# EAGLE board REMOTE_CONTROL (EAGLE 9.1.3)
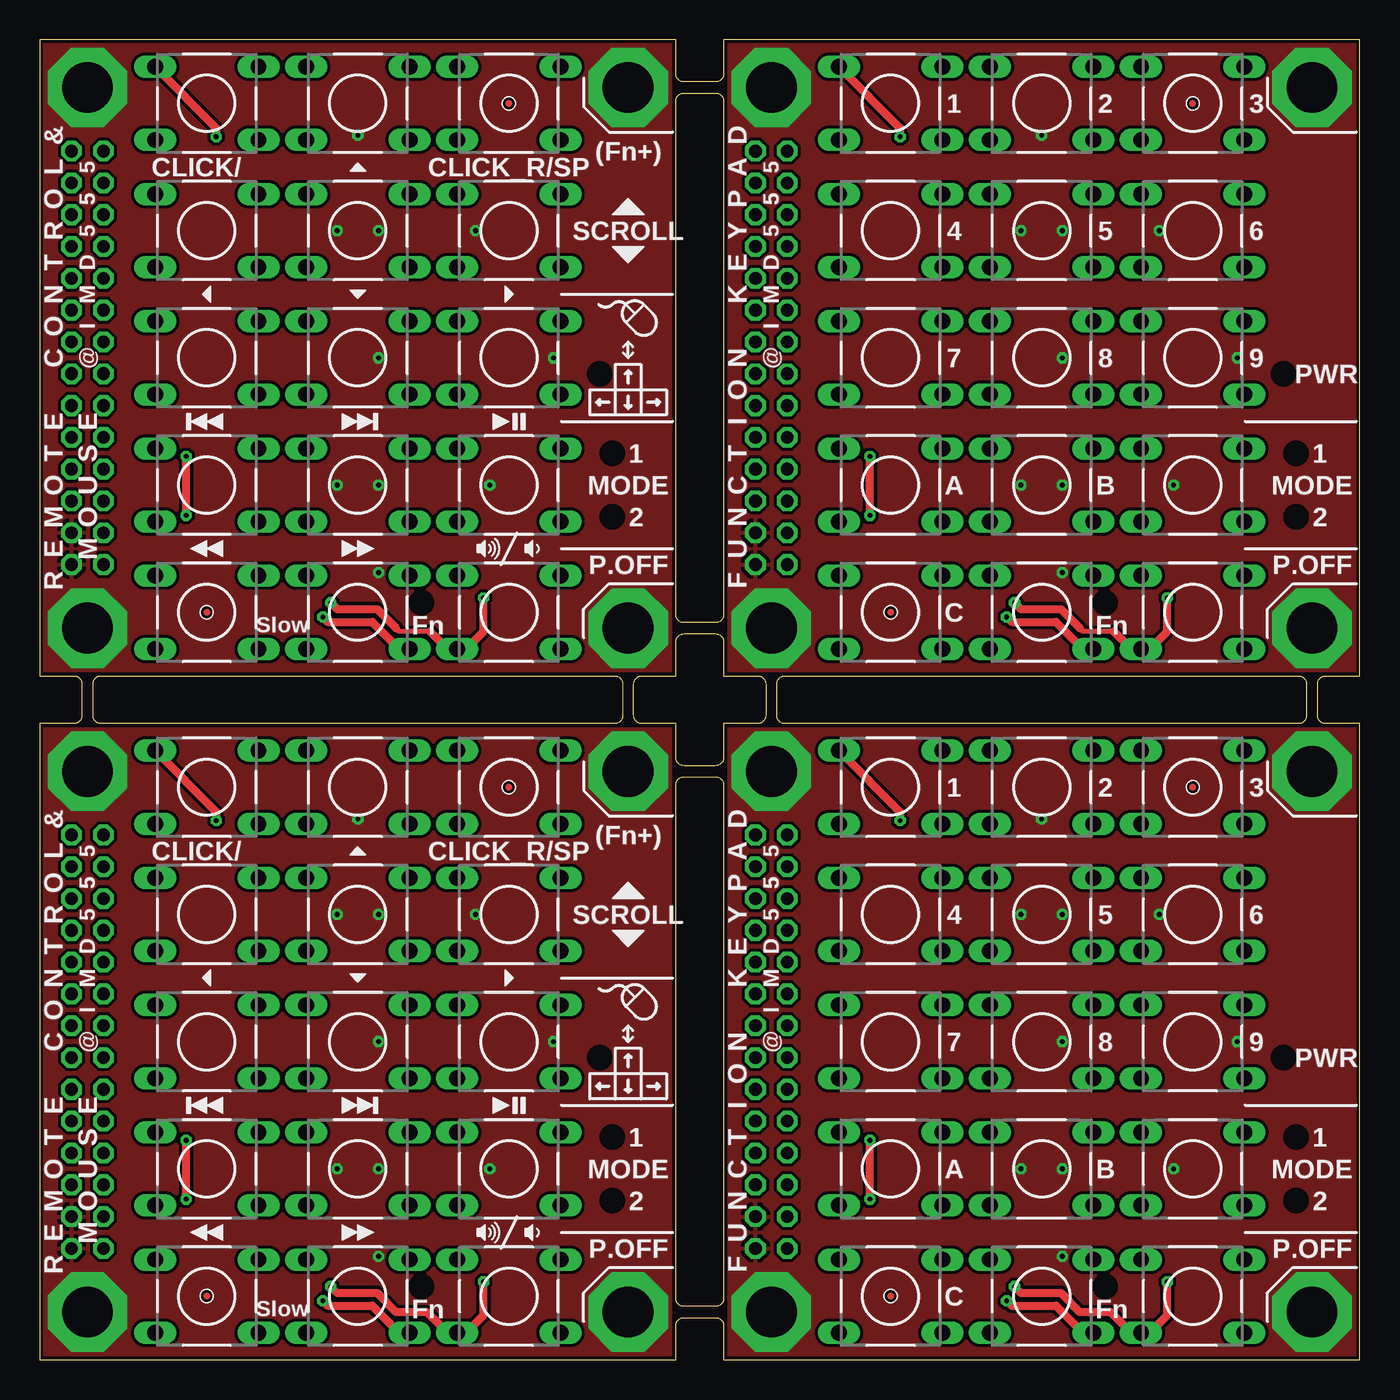
[diagram p0: board, top side]
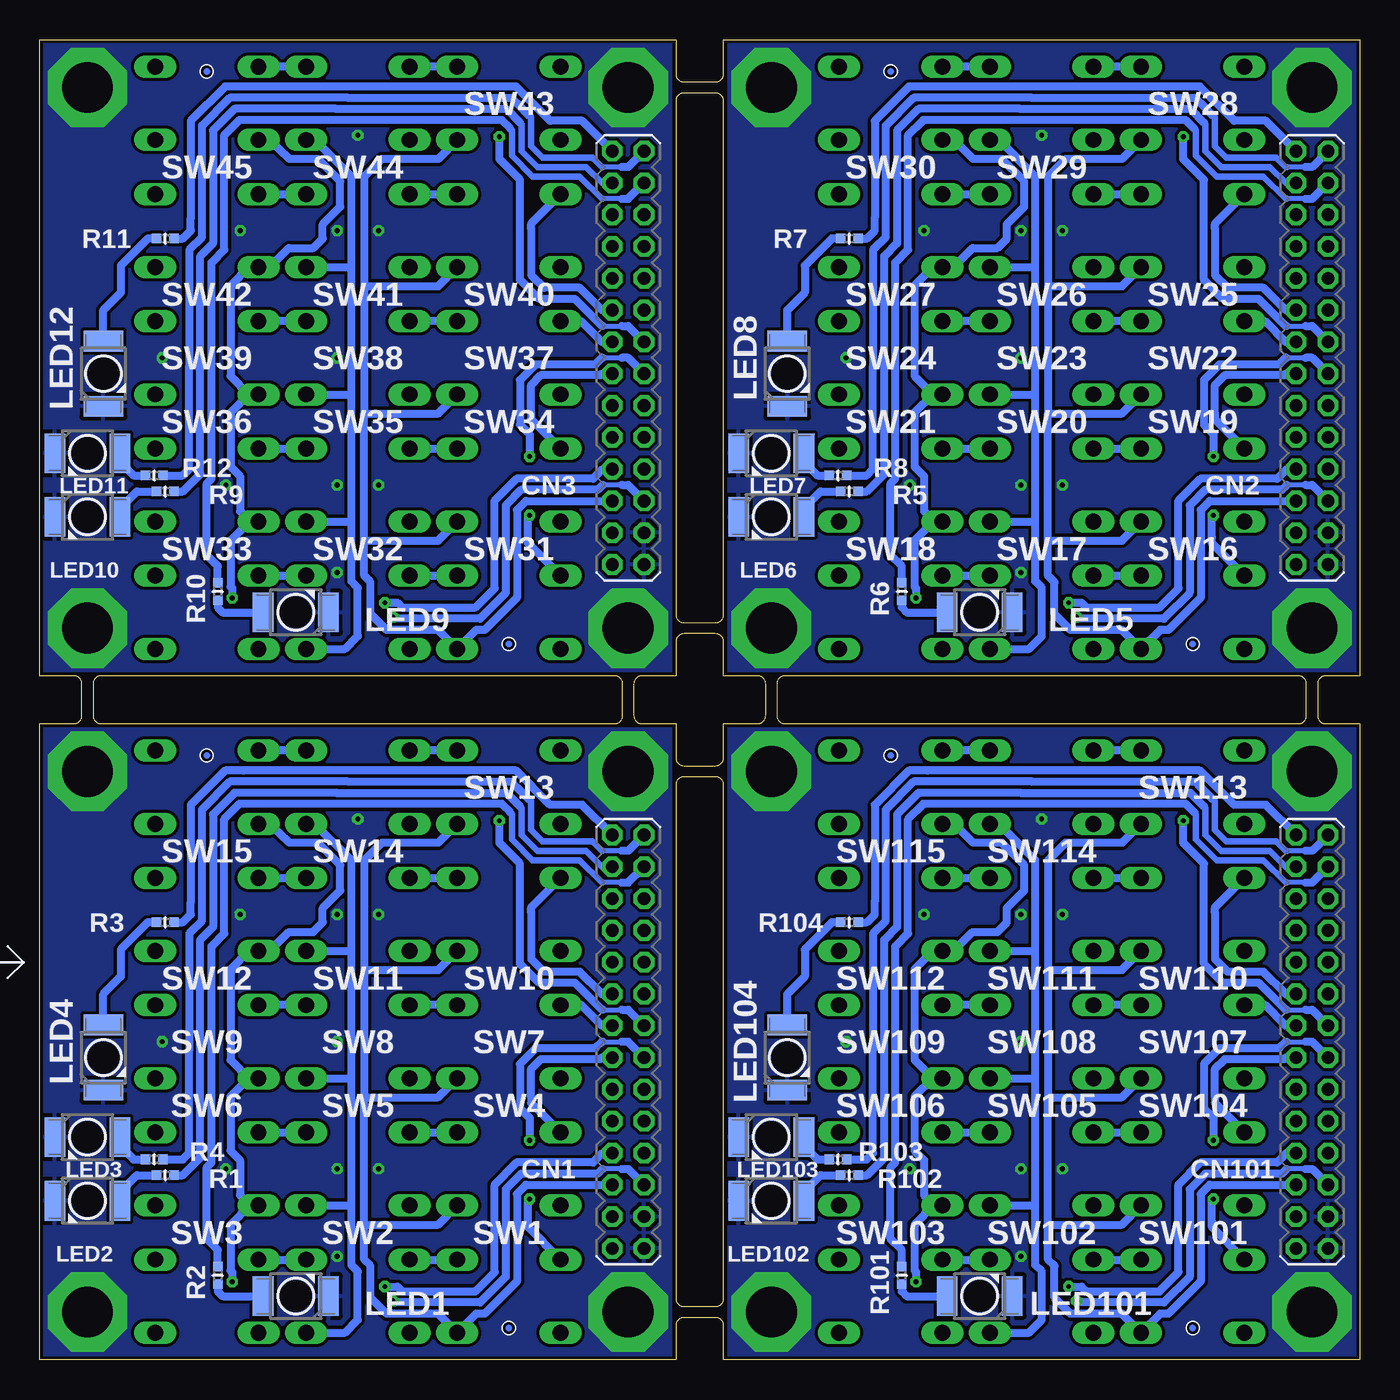
[diagram p1: board, bottom side, seen from below]

Size 83 x 83 mm. Coordinates in mm from the lower left corner, seen from the top.
Outline: 43,0 83,0 83,40 80.85,40 arc-90 80.35,40.5 80.35,42.5 arc-90 80.85,43 83,43 83,83 43,83 43,80.85 arc-90 42.5,80.35 40.5,80.35 arc-90 40,80.85 40,83 0,83 0,43 2.15,43 arc-90 2.65,42.5 2.65,40.5 arc-90 2.15,40 0,40 0,0 40,0 40,2.15 arc-90 40.5,2.65 42.5,2.65 arc-90 43,2.15 43,0
Outline: 79.15,40 46.85,40 arc-90 46.35,40.5 46.35,42.5 arc-90 46.85,43 79.15,43 arc-90 79.65,42.5 79.65,40.5 arc-90 79.15,40
Outline: 45.15,40 43,40 43,37.85 arc-90 42.5,37.35 40.5,37.35 arc-90 40,37.85 40,40 37.85,40 arc-90 37.35,40.5 37.35,42.5 arc-90 37.85,43 40,43 40,45.15 arc-90 40.5,45.65 42.5,45.65 arc-90 43,45.15 43,43 45.15,43 arc-90 45.65,42.5 45.65,40.5 arc-90 45.15,40
Outline: 43,36.15 43,3.85 arc-90 42.5,3.35 40.5,3.35 arc-90 40,3.85 40,36.15 arc-90 40.5,36.65 42.5,36.65 arc-90 43,36.15
Outline: 36.15,40 3.85,40 arc-90 3.35,40.5 3.35,42.5 arc-90 3.85,43 36.15,43 arc-90 36.65,42.5 36.65,40.5 arc-90 36.15,40
Outline: 40,46.85 40,79.15 arc-90 40.5,79.65 42.5,79.65 arc-90 43,79.15 43,46.85 arc-90 42.5,46.35 40.5,46.35 arc-90 40,46.85
Copper layers (1*16): Top 0.035mm / dielectric 1.5mm / Bottom 0.035mm
Design rules "SeeedStudio_2layer_DRU_no_angle_20140221_IMD555 *": minimum track width 0.2mm, minimum drill 0.3mm, track to track 0.2mm, track to pad 0.16mm, pad to pad 0.2mm, via to via 0.2mm, smd to smd 0mil, copper to edge 0.2mm, drill to drill 10mil, minimum pad ring 0.2mm, minimum via ring 0.2mm, stop-mask expansion 0.03mm, vias tented up to drill 5mm, thermal gap 10mil
tRestrict: area 23.2,3.8 to 24.8,5.4; area 35.2,9.2 to 36.8,10.8; area 35.2,13.2 to 36.8,14.8; area 34.4,18.2 to 36,19.8; area 78.2,9.2 to 79.8,10.8; area 78.2,13.2 to 79.8,14.8; area 77.4,18.2 to 79,19.8; area 66.2,3.8 to 67.8,5.4; area 0,39.8 to 83,43.2; area 39.8,0 to 43.2,83; area 23.2,46.8 to 24.8,48.4; area 35.2,52.2 to 36.8,53.8; area 35.2,56.2 to 36.8,57.8; area 34.4,61.2 to 36,62.8; area 78.2,52.2 to 79.8,53.8; area 78.2,56.2 to 79.8,57.8; area 77.4,61.2 to 79,62.8; area 66.2,46.8 to 67.8,48.4
bRestrict: area 39.8,0 to 43.2,83; area 0,39.8 to 83,43.2

## Footprints (pad centres in the part's own frame; a part is rotated, then mirrored left to right if it is on the bottom)
2MM_14X2_R = drill 0.8 pad 1.3 octagon: 1 -13,1; 2 -13,-1; 3 -11,1; 4 -11,-1; 5 -9,1; 6 -9,-1; 7 -7,1; 8 -7,-1; 9 -5,1; 10 -5,-1; 11 -3,1; 12 -3,-1; 13 -1,1; 14 -1,-1; 15 1,1; 16 1,-1; 17 3,1; 18 3,-1; 19 5,1; 20 5,-1; 21 7,1; 22 7,-1; 23 9,1; 24 9,-1; 25 11,1; 26 11,-1; 27 13,1; 28 13,-1
P-LCC-2-TOPLED-RG = smd 2.5 x 1.3: A 0,2.05; C 0,-2.05
R0402-SS = smd 0.6 x 0.6: 1 -0.55,0; 2 0.55,0
DTS-6 = drill 1 long: 1 -3.25,2.3; 2 3.25,2.3; 3 -3.25,-2.3; 4 3.25,-2.3

## Placement (x,y rotation side)
CN1  14X2R  [2MM_14X2_R]  46,20 90 bottom
CN2  14X2R  [2MM_14X2_R]  3,63 90 bottom
CN3  14X2R  [2MM_14X2_R]  46,63 90 bottom
CN101  14X2R  [2MM_14X2_R]  3,20 90 bottom
LED1  [P-LCC-2-TOPLED-RG]  66.9,4 90 bottom
LED2  [P-LCC-2-TOPLED-RG]  80,10 270 bottom
LED3  [P-LCC-2-TOPLED-RG]  80,14 270 bottom
LED4  [P-LCC-2-TOPLED-RG]  79,19 0 bottom
LED5  [P-LCC-2-TOPLED-RG]  23.9,47 90 bottom
LED6  [P-LCC-2-TOPLED-RG]  37,53 270 bottom
LED7  [P-LCC-2-TOPLED-RG]  37,57 270 bottom
LED8  [P-LCC-2-TOPLED-RG]  36,62 0 bottom
LED9  [P-LCC-2-TOPLED-RG]  66.9,47 90 bottom
LED10  [P-LCC-2-TOPLED-RG]  80,53 270 bottom
LED11  [P-LCC-2-TOPLED-RG]  80,57 270 bottom
LED12  [P-LCC-2-TOPLED-RG]  79,62 0 bottom
LED101  [P-LCC-2-TOPLED-RG]  23.9,4 90 bottom
LED102  [P-LCC-2-TOPLED-RG]  37,10 270 bottom
LED103  [P-LCC-2-TOPLED-RG]  37,14 270 bottom
LED104  [P-LCC-2-TOPLED-RG]  36,19 0 bottom
R1  [R0402-SS]  75.1,11.6 0 bottom
R2  [R0402-SS]  71.8,5.3 90 bottom
R3  [R0402-SS]  75.1,27.5 0 bottom
R4  [R0402-SS]  75.8,12.6 0 bottom
R5  [R0402-SS]  32.1,54.6 0 bottom
R6  [R0402-SS]  28.8,48.3 90 bottom
R7  [R0402-SS]  32.1,70.5 0 bottom
R8  [R0402-SS]  32.8,55.6 0 bottom
R9  [R0402-SS]  75.1,54.6 0 bottom
R10  [R0402-SS]  71.8,48.3 90 bottom
R11  [R0402-SS]  75.1,70.5 0 bottom
R12  [R0402-SS]  75.8,55.6 0 bottom
R101  [R0402-SS]  28.8,5.3 90 bottom
R102  [R0402-SS]  32.1,11.6 0 bottom
R103  [R0402-SS]  32.8,12.6 0 bottom
R104  [R0402-SS]  32.1,27.5 0 bottom
SW1  DTS-6  [DTS-6]  53.5,4 0 top
SW2  DTS-6  [DTS-6]  63,4 0 top
SW3  DTS-6  [DTS-6]  72.5,4 0 top
SW4  DTS-6  [DTS-6]  53.5,12 0 top
SW5  DTS-6  [DTS-6]  63,12 0 top
SW6  DTS-6  [DTS-6]  72.5,12 0 top
SW7  DTS-6  [DTS-6]  53.5,20 0 top
SW8  DTS-6  [DTS-6]  63,20 0 top
SW9  DTS-6  [DTS-6]  72.5,20 0 top
SW10  DTS-6  [DTS-6]  53.5,28 0 top
SW11  DTS-6  [DTS-6]  63,28 0 top
SW12  DTS-6  [DTS-6]  72.5,28 0 top
SW13  DTS-6  [DTS-6]  53.5,36 0 top
SW14  DTS-6  [DTS-6]  63,36 0 top
SW15  DTS-6  [DTS-6]  72.5,36 0 top
SW16  DTS-6  [DTS-6]  10.5,47 0 top
SW17  DTS-6  [DTS-6]  20,47 0 top
SW18  DTS-6  [DTS-6]  29.5,47 0 top
SW19  DTS-6  [DTS-6]  10.5,55 0 top
SW20  DTS-6  [DTS-6]  20,55 0 top
SW21  DTS-6  [DTS-6]  29.5,55 0 top
SW22  DTS-6  [DTS-6]  10.5,63 0 top
SW23  DTS-6  [DTS-6]  20,63 0 top
SW24  DTS-6  [DTS-6]  29.5,63 0 top
SW25  DTS-6  [DTS-6]  10.5,71 0 top
SW26  DTS-6  [DTS-6]  20,71 0 top
SW27  DTS-6  [DTS-6]  29.5,71 0 top
SW28  DTS-6  [DTS-6]  10.5,79 0 top
SW29  DTS-6  [DTS-6]  20,79 0 top
SW30  DTS-6  [DTS-6]  29.5,79 0 top
SW31  DTS-6  [DTS-6]  53.5,47 0 top
SW32  DTS-6  [DTS-6]  63,47 0 top
SW33  DTS-6  [DTS-6]  72.5,47 0 top
SW34  DTS-6  [DTS-6]  53.5,55 0 top
SW35  DTS-6  [DTS-6]  63,55 0 top
SW36  DTS-6  [DTS-6]  72.5,55 0 top
SW37  DTS-6  [DTS-6]  53.5,63 0 top
SW38  DTS-6  [DTS-6]  63,63 0 top
SW39  DTS-6  [DTS-6]  72.5,63 0 top
SW40  DTS-6  [DTS-6]  53.5,71 0 top
SW41  DTS-6  [DTS-6]  63,71 0 top
SW42  DTS-6  [DTS-6]  72.5,71 0 top
SW43  DTS-6  [DTS-6]  53.5,79 0 top
SW44  DTS-6  [DTS-6]  63,79 0 top
SW45  DTS-6  [DTS-6]  72.5,79 0 top
SW101  DTS-6  [DTS-6]  10.5,4 0 top
SW102  DTS-6  [DTS-6]  20,4 0 top
SW103  DTS-6  [DTS-6]  29.5,4 0 top
SW104  DTS-6  [DTS-6]  10.5,12 0 top
SW105  DTS-6  [DTS-6]  20,12 0 top
SW106  DTS-6  [DTS-6]  29.5,12 0 top
SW107  DTS-6  [DTS-6]  10.5,20 0 top
SW108  DTS-6  [DTS-6]  20,20 0 top
SW109  DTS-6  [DTS-6]  29.5,20 0 top
SW110  DTS-6  [DTS-6]  10.5,28 0 top
SW111  DTS-6  [DTS-6]  20,28 0 top
SW112  DTS-6  [DTS-6]  29.5,28 0 top
SW113  DTS-6  [DTS-6]  10.5,36 0 top
SW114  DTS-6  [DTS-6]  20,36 0 top
SW115  DTS-6  [DTS-6]  29.5,36 0 top
U$1  [PCB_CHECK]  29.5,36 0 top
U$2  [PCB_CHECK]  72.5,36 0 top
U$3  [PCB_CHECK]  53.5,4 0 top
U$4  [PCB_CHECK]  10.5,4 0 top
U$5  [PCB_CHECK]  72.5,38 0 bottom
U$6  [PCB_CHECK]  29.5,38 0 bottom
U$7  [PCB_CHECK]  10.5,2 0 bottom
U$8  [PCB_CHECK]  53.5,2 0 bottom
U$9  [PCB_CHECK]  29.5,79 0 top
U$10  [PCB_CHECK]  10.5,47 0 top
U$11  [PCB_CHECK]  29.5,81 0 bottom
U$12  [PCB_CHECK]  10.5,45 0 bottom
U$13  [PCB_CHECK]  72.5,79 0 top
U$14  [PCB_CHECK]  53.5,47 0 top
U$15  [PCB_CHECK]  72.5,81 0 bottom
U$16  [PCB_CHECK]  53.5,45 0 bottom

## Library data of the parts
CN1-CN3 CN101 = 4 _l__l_
LED1-LED12 LED101-LED104 = 8 LED
R1-R12 R101-R104 = 2 RCL
SW1-SW45 SW101-SW115 = 3 switch-tact
U$1-U$16 = 0 my parts

## Nets
C0: CN101.13 SW104.1
C1: CN101.14 SW101.1
C2: CN101.15 SW107.1
C3: CN101.16 SW113.1
C4: CN101.17 SW110.1
C5: CN101.18
C6: CN101.19
C7: CN101.20
C8: CN101.21
C9: CN101.22
C10: CN101.23
C11: CN101.24
C12: CN1.13 SW4.1
C13: CN1.14 SW1.1
C14: CN1.15 SW7.1
C15: CN1.16 SW13.1
C16: CN1.17 SW10.1
C17: CN1.18
C18: CN1.19
C19: CN1.20
C20: CN1.21
C21: CN1.22
C22: CN1.23
C23: CN1.24
C24: CN2.13 SW19.1
C25: CN2.14 SW16.1
C26: CN2.15 SW22.1
C27: CN2.16 SW28.1
C28: CN2.17 SW25.1
C29: CN2.18
C30: CN2.19
C31: CN2.20
C32: CN2.21
C33: CN2.22
C34: CN2.23
C35: CN2.24
C36: CN3.13 SW34.1
C37: CN3.14 SW31.1
C38: CN3.15 SW37.1
C39: CN3.16 SW43.1
C40: CN3.17 SW40.1
C41: CN3.18
C42: CN3.19
C43: CN3.20
C44: CN3.21
C45: CN3.22
C46: CN3.23
C47: CN3.24
GND: CN101.2 CN101.4 LED101.C LED102.C LED103.C LED104.C
GND1: CN1.2 CN1.4 LED1.C LED2.C LED3.C LED4.C
GND2: CN2.2 CN2.4 LED5.C LED6.C LED7.C LED8.C
GND3: CN3.2 CN3.4 LED9.C LED10.C LED11.C LED12.C
L0: CN101.25 R102.2
L1: CN101.26 R101.2
L2: CN101.27 R104.2
L3: CN101.28 R103.2
L4: CN1.26 R2.2
L5: CN1.28 R4.2
L6: CN1.25 R1.2
L7: CN1.27 R3.2
L8: CN2.26 R6.2
L9: CN2.28 R8.2
L10: CN2.25 R5.2
L11: CN2.27 R7.2
L12: CN3.26 R10.2
L13: CN3.28 R12.2
L14: CN3.25 R9.2
L15: CN3.27 R11.2
N$1: LED104.A R104.1
N$2: SW114.2 SW115.1
N$3: LED103.A R103.1
N$4: SW111.2 SW112.1
N$5: SW108.2 SW109.1
N$6: LED102.A R102.1
N$7: LED101.A R101.1
N$8: SW102.2 SW103.1
N$9: SW105.2 SW106.1
N$10: SW14.2 SW15.1
N$11: SW110.2 SW111.1
N$12: SW107.2 SW108.1
N$13: SW104.2 SW105.1
N$14: SW101.2 SW102.1
N$15: SW113.2 SW114.1
N$16: SW11.2 SW12.1
N$17: SW8.2 SW9.1
N$18: SW2.2 SW3.1
N$19: SW5.2 SW6.1
N$20: SW10.2 SW11.1
N$21: SW7.2 SW8.1
N$22: SW4.2 SW5.1
N$23: SW1.2 SW2.1
N$24: SW13.2 SW14.1
N$25: LED4.A R3.1
N$26: LED3.A R4.1
N$27: LED2.A R1.1
N$28: LED1.A R2.1
N$29: SW29.2 SW30.1
N$30: SW26.2 SW27.1
N$31: SW23.2 SW24.1
N$32: SW17.2 SW18.1
N$33: SW20.2 SW21.1
N$34: SW25.2 SW26.1
N$35: SW22.2 SW23.1
N$36: SW19.2 SW20.1
N$37: SW16.2 SW17.1
N$38: SW28.2 SW29.1
N$39: LED8.A R7.1
N$40: LED7.A R8.1
N$41: LED6.A R5.1
N$42: LED5.A R6.1
N$43: SW44.2 SW45.1
N$44: SW41.2 SW42.1
N$45: SW38.2 SW39.1
N$46: SW32.2 SW33.1
N$47: SW35.2 SW36.1
N$48: SW40.2 SW41.1
N$49: SW37.2 SW38.1
N$50: SW34.2 SW35.1
N$51: SW31.2 SW32.1
N$52: SW43.2 SW44.1
N$53: LED12.A R11.1
N$54: LED11.A R12.1
N$55: LED10.A R9.1
N$56: LED9.A R10.1
R0: CN101.5 SW101.4 SW104.4 SW107.4 SW110.4 SW113.4
R1: CN101.6 SW102.4 SW105.4 SW108.4 SW111.4 SW114.4
R2: CN101.7 SW103.3 SW106.3 SW109.3 SW112.3 SW115.3
R3: CN101.8
R4: CN101.9
R5: CN101.10
R6: CN1.5 SW1.4 SW4.4 SW7.4 SW10.4 SW13.4
R7: CN1.6 SW2.4 SW5.4 SW8.4 SW11.4 SW14.4
R8: CN1.7 SW3.3 SW6.3 SW9.3 SW12.3 SW15.3
R9: CN1.8
R10: CN1.9
R11: CN1.10
R12: CN2.5 SW16.4 SW19.4 SW22.4 SW25.4 SW28.4
R13: CN2.6 SW17.4 SW20.4 SW23.4 SW26.4 SW29.4
R14: CN2.7 SW18.3 SW21.3 SW24.3 SW27.3 SW30.3
R15: CN2.8
R16: CN2.9
R17: CN2.10
R18: CN3.5 SW31.4 SW34.4 SW37.4 SW40.4 SW43.4
R19: CN3.6 SW32.4 SW35.4 SW38.4 SW41.4 SW44.4
R20: CN3.7 SW33.3 SW36.3 SW39.3 SW42.3 SW45.3
R21: CN3.8
R22: CN3.9
R23: CN3.10

## Tracks (layer width: path | path; a pad name or v marks a point on that pad's centre or on a via)
C0
  Bottom 0.5: CN101.13 4.65,19 4.75,18.9 8.5,18.9 9.1,18.3 9.1,16.5 9.1,16.2 9.1,16.15 SW104.1
C1  (via drill 0.3 pad 0.7)
  Top 0.5: v9.2,10.1 v9.2,13.8
  Bottom 0.3: 4.6,20 3.4,20
  Bottom 0.5: 3.4,20 3,20 CN101.14 | 4.6,20 4.65,20 5.05,19.6 8.8,19.6 9.8,18.6 9.8,15.8 9.2,15.2 v9.2,13.8 | SW101.1 9.3,8.35 9.3,8.4 9.3,8.7 9.3,10 v9.2,10.1
C2
  Bottom 0.5: CN101.15 4.65,21 5.95,22.3 SW107.1
C3  (via drill 0.3 pad 0.7)
  Top 0.5: v11.1,33.9 11.1,34.3 11.1,34.4 11.1,34.45 SW113.1
  Bottom 0.3: 4.6,22 3.4,22
  Bottom 0.5: CN101.16 3,22 3.4,22 | 4.6,22 4.65,22 6.35,23.7 8.6,23.7 9.8,24.9 9.8,31.2 11.1,32.5 v11.1,33.9
C4
  Bottom 0.5: CN101.17 4.65,23 6.05,24.4 8.3,24.4 9.1,25.2 9.1,28.1 9.1,28.4 9.1,28.45 SW110.1
C12
  Bottom 0.5: CN1.13 47.65,19 47.75,18.9 51.5,18.9 52.1,18.3 52.1,16.5 52.1,16.2 52.1,16.15 SW4.1
C13  (via drill 0.3 pad 0.7)
  Top 0.5: v52.2,10.1 v52.2,13.8
  Bottom 0.3: 47.6,20 46.4,20
  Bottom 0.5: 46.4,20 46,20 CN1.14 | 47.6,20 47.65,20 48.05,19.6 51.8,19.6 52.8,18.6 52.8,15.8 52.2,15.2 v52.2,13.8 | SW1.1 52.3,8.35 52.3,8.4 52.3,8.7 52.3,10 v52.2,10.1
C14
  Bottom 0.5: CN1.15 47.65,21 48.95,22.3 SW7.1
C15  (via drill 0.3 pad 0.7)
  Top 0.5: v54.1,33.9 54.1,34.3 54.1,34.4 54.1,34.45 SW13.1
  Bottom 0.3: 47.6,22 46.4,22
  Bottom 0.5: CN1.16 46,22 46.4,22 | 47.6,22 47.65,22 49.35,23.7 51.6,23.7 52.8,24.9 52.8,31.2 54.1,32.5 v54.1,33.9
C16
  Bottom 0.5: CN1.17 47.65,23 49.05,24.4 51.3,24.4 52.1,25.2 52.1,28.1 52.1,28.4 52.1,28.45 SW10.1
C24
  Bottom 0.5: CN2.13 4.65,62 4.75,61.9 8.5,61.9 9.1,61.3 9.1,59.5 9.1,59.2 9.1,59.15 SW19.1
C25  (via drill 0.3 pad 0.7)
  Top 0.5: v9.2,53.1 v9.2,56.8
  Bottom 0.3: 4.6,63 3.4,63
  Bottom 0.5: 3.4,63 3,63 CN2.14 | 4.6,63 4.65,63 5.05,62.6 8.8,62.6 9.8,61.6 9.8,58.8 9.2,58.2 v9.2,56.8 | SW16.1 9.3,51.35 9.3,51.4 9.3,51.7 9.3,53 v9.2,53.1
C26
  Bottom 0.5: CN2.15 4.65,64 5.95,65.3 SW22.1
C27  (via drill 0.3 pad 0.7)
  Top 0.5: v11.1,76.9 11.1,77.3 11.1,77.4 11.1,77.45 SW28.1
  Bottom 0.3: 4.6,65 3.4,65
  Bottom 0.5: CN2.16 3,65 3.4,65 | 4.6,65 4.65,65 6.35,66.7 8.6,66.7 9.8,67.9 9.8,74.2 11.1,75.5 v11.1,76.9
C28
  Bottom 0.5: CN2.17 4.65,66 6.05,67.4 8.3,67.4 9.1,68.2 9.1,71.1 9.1,71.4 9.1,71.45 SW25.1
C36
  Bottom 0.5: CN3.13 47.65,62 47.75,61.9 51.5,61.9 52.1,61.3 52.1,59.5 52.1,59.2 52.1,59.15 SW34.1
C37  (via drill 0.3 pad 0.7)
  Top 0.5: v52.2,53.1 v52.2,56.8
  Bottom 0.3: 47.6,63 46.4,63
  Bottom 0.5: 46.4,63 46,63 CN3.14 | 47.6,63 47.65,63 48.05,62.6 51.8,62.6 52.8,61.6 52.8,58.8 52.2,58.2 v52.2,56.8 | SW31.1 52.3,51.35 52.3,51.4 52.3,51.7 52.3,53 v52.2,53.1
C38
  Bottom 0.5: CN3.15 47.65,64 48.95,65.3 SW37.1
C39  (via drill 0.3 pad 0.7)
  Top 0.5: v54.1,76.9 54.1,77.3 54.1,77.4 54.1,77.45 SW43.1
  Bottom 0.3: 47.6,65 46.4,65
  Bottom 0.5: CN3.16 46,65 46.4,65 | 47.6,65 47.65,65 49.35,66.7 51.6,66.7 52.8,67.9 52.8,74.2 54.1,75.5 v54.1,76.9
C40
  Bottom 0.5: CN3.17 47.65,66 49.05,67.4 51.3,67.4 52.1,68.2 52.1,71.1 52.1,71.4 52.1,71.45 SW40.1
GND  (via drill 0.3 pad 0.7, 3.2 pad 5)
  other vias: 3,37 37,37 37,3 3,3 21.3,12 18.7,12 18.7,28 21.3,28 20,34 27.4,28 21.3,20 28.3,12 21.3,6.5 32.3,20
  pour Bottom: 0,40 40,40 40,0 0,0
  pour Top (rank 2): 0,40 40,40 40,0 0,0
GND1  (via drill 0.3 pad 0.7, 3.2 pad 5)
  other vias: 46,37 80,37 80,3 46,3 64.3,12 61.7,12 61.7,28 64.3,28 63,34 70.4,28 64.3,20 71.3,12 64.3,6.5 75.3,20
  pour Bottom: 43,40 83,40 83,0 43,0
  pour Top (rank 2): 43,40 83,40 83,0 43,0
GND2  (via drill 0.3 pad 0.7, 3.2 pad 5)
  other vias: 3,80 37,80 37,46 3,46 21.3,55 18.7,55 18.7,71 21.3,71 20,77 27.4,71 21.3,63 28.3,55 21.3,49.5 32.3,63
  pour Bottom: 0,83 40,83 40,43 0,43
  pour Top (rank 2): 0,83 40,83 40,43 0,43
GND3  (via drill 0.3 pad 0.7, 3.2 pad 5)
  other vias: 46,80 80,80 80,46 46,46 64.3,55 61.7,55 61.7,71 64.3,71 63,77 70.4,71 64.3,63 71.3,55 64.3,49.5 75.3,63
  pour Bottom: 43,83 83,83 83,43 43,43
  pour Top (rank 2): 43,83 83,83 83,43 43,43
L0
  Bottom 0.4: CN101.25 4.65,31 5.65,32 8.7,32 9.7,33 9.7,34.7 9.8,34.8
  Bottom 0.5: 9.8,34.8 10.65,35.65 21.35,35.65 27.75,35.65 29.1,34.3 29.1,27.2 29.9,26.4 29.9,12.7 31,11.6 R102.2
L1
  Bottom 0.3: 3.4,30 4.6,30
  Bottom 0.4: 4.6,30 4.65,30 6.05,31.4 9,31.4 10.3,32.7 10.3,34.3 10.4,34.4
  Bottom 0.5: CN101.26 3,30 3.4,30 | 10.4,34.4 10.95,34.95 27.45,34.95 28.4,34 28.4,26.8 29.2,26 29.2,12.4 29.5,12.1 29.5,7.6 28.8,6.9 R101.2
L2
  Bottom 0.5: CN101.27 5.9,34.9 7.9,34.9 10.05,37.05 27.21,37.05 28.35,37.05 30.5,34.9 30.5,28.8 30.5,28 31,27.5 R104.2
L3
  Bottom 0.3: 3.4,32 4.6,32
  Bottom 0.4: 4.6,32 4.65,32 5.25,32.6 8.4,32.6 9.1,33.3 9.1,35.1 9.2,35.2
  Bottom 0.5: CN101.28 3,32 3.4,32 | 9.2,35.2 10,36 10.01,36 10.36,36.35 20.6,36.35 28.05,36.35 29.8,34.6 29.8,27.6 30.6,26.8 30.6,19.5 30.6,13 31,12.6 R103.2
L4
  Bottom 0.3: 46.4,30 47.6,30
  Bottom 0.4: 47.6,30 47.65,30 49.05,31.4 52,31.4 53.3,32.7 53.3,34.3 53.4,34.4
  Bottom 0.5: CN1.26 46,30 46.4,30 | 53.4,34.4 53.95,34.95 70.45,34.95 71.4,34 71.4,26.8 72.2,26 72.2,12.4 72.5,12.1 72.5,7.6 71.8,6.9 R2.2
L5
  Bottom 0.3: 46.4,32 47.6,32
  Bottom 0.4: 47.6,32 47.65,32 48.25,32.6 51.4,32.6 52.1,33.3 52.1,35.1 52.2,35.2
  Bottom 0.5: CN1.28 46,32 46.4,32 | 52.2,35.2 53,36 53.01,36 53.36,36.35 63.6,36.35 71.05,36.35 72.8,34.6 72.8,27.6 73.6,26.8 73.6,19.5 73.6,13 74,12.6 R4.2
L6
  Bottom 0.4: CN1.25 47.65,31 48.65,32 51.7,32 52.7,33 52.7,34.7 52.8,34.8
  Bottom 0.5: 52.8,34.8 53.65,35.65 64.35,35.65 70.75,35.65 72.1,34.3 72.1,27.2 72.9,26.4 72.9,12.7 74,11.6 R1.2
L7
  Bottom 0.5: CN1.27 48.9,34.9 50.9,34.9 53.05,37.05 70.21,37.05 71.35,37.05 73.5,34.9 73.5,28.8 73.5,28 74,27.5 R3.2
L8
  Bottom 0.3: 3.4,73 4.6,73
  Bottom 0.4: 4.6,73 4.65,73 6.05,74.4 9,74.4 10.3,75.7 10.3,77.3 10.4,77.4
  Bottom 0.5: CN2.26 3,73 3.4,73 | 10.4,77.4 10.95,77.95 27.45,77.95 28.4,77 28.4,69.8 29.2,69 29.2,55.4 29.5,55.1 29.5,50.6 28.8,49.9 R6.2
L9
  Bottom 0.3: 3.4,75 4.6,75
  Bottom 0.4: 4.6,75 4.65,75 5.25,75.6 8.4,75.6 9.1,76.3 9.1,78.1 9.2,78.2
  Bottom 0.5: CN2.28 3,75 3.4,75 | 9.2,78.2 10,79 10.01,79 10.36,79.35 20.6,79.35 28.05,79.35 29.8,77.6 29.8,70.6 30.6,69.8 30.6,62.5 30.6,56 31,55.6 R8.2
L10
  Bottom 0.4: CN2.25 4.65,74 5.65,75 8.7,75 9.7,76 9.7,77.7 9.8,77.8
  Bottom 0.5: 9.8,77.8 10.65,78.65 21.35,78.65 27.75,78.65 29.1,77.3 29.1,70.2 29.9,69.4 29.9,55.7 31,54.6 R5.2
L11
  Bottom 0.5: CN2.27 5.9,77.9 7.9,77.9 10.05,80.05 27.21,80.05 28.35,80.05 30.5,77.9 30.5,71.8 30.5,71 31,70.5 R7.2
L12
  Bottom 0.3: 46.4,73 47.6,73
  Bottom 0.4: 47.6,73 47.65,73 49.05,74.4 52,74.4 53.3,75.7 53.3,77.3 53.4,77.4
  Bottom 0.5: CN3.26 46,73 46.4,73 | 53.4,77.4 53.95,77.95 70.45,77.95 71.4,77 71.4,69.8 72.2,69 72.2,55.4 72.5,55.1 72.5,50.6 71.8,49.9 R10.2
L13
  Bottom 0.3: 46.4,75 47.6,75
  Bottom 0.4: 47.6,75 47.65,75 48.25,75.6 51.4,75.6 52.1,76.3 52.1,78.1 52.2,78.2
  Bottom 0.5: CN3.28 46,75 46.4,75 | 52.2,78.2 53,79 53.01,79 53.36,79.35 63.6,79.35 71.05,79.35 72.8,77.6 72.8,70.6 73.6,69.8 73.6,62.5 73.6,56 74,55.6 R12.2
L14
  Bottom 0.4: CN3.25 47.65,74 48.65,75 51.7,75 52.7,76 52.7,77.7 52.8,77.8
  Bottom 0.5: 52.8,77.8 53.65,78.65 64.35,78.65 70.75,78.65 72.1,77.3 72.1,70.2 72.9,69.4 72.9,55.7 74,54.6 R9.2
L15
  Bottom 0.5: CN3.27 48.9,77.9 50.9,77.9 53.05,80.05 70.21,80.05 71.35,80.05 73.5,77.9 73.5,71.8 73.5,71 74,70.5 R11.2
N$1
  Bottom 0.5: LED104.A 36,23 34.9,24.1 34.9,25.8 33.2,27.5 R104.1
N$2
  Bottom 0.5: SW114.2 SW115.1
N$3
  Bottom 0.5: LED103.A 34.95,13.45 34.1,12.6 R103.1
N$4
  Bottom 0.5: SW112.1 SW111.2
N$5
  Bottom 0.5: SW108.2 SW109.1
N$6
  Bottom 0.5: LED102.A 34.95,10.55 33.9,11.6 R102.1
N$7
  Bottom 0.5: R101.1 28.8,4.3 28.5,4 LED101.A
N$8
  Bottom 0.5: SW103.1 SW102.2
N$9
  Bottom 0.5: SW106.1 SW105.2
N$10
  Bottom 0.5: SW14.2 SW15.1
N$11
  Bottom 0.5: SW111.1 SW110.2
N$12
  Bottom 0.5: SW107.2 SW108.1
N$13
  Bottom 0.5: SW105.1 SW104.2
N$14
  Bottom 0.5: SW102.1 SW101.2
N$15
  Bottom 0.5: SW113.2 SW114.1
N$16
  Bottom 0.5: SW12.1 SW11.2
N$17
  Bottom 0.5: SW8.2 SW9.1
N$18
  Bottom 0.5: SW3.1 SW2.2
N$19
  Bottom 0.5: SW6.1 SW5.2
N$20
  Bottom 0.5: SW11.1 SW10.2
N$21
  Bottom 0.5: SW7.2 SW8.1
N$22
  Bottom 0.5: SW5.1 SW4.2
N$23
  Bottom 0.5: SW2.1 SW1.2
N$24
  Bottom 0.5: SW13.2 SW14.1
N$25
  Bottom 0.5: LED4.A 79,23 77.9,24.1 77.9,25.8 76.2,27.5 R3.1
N$26
  Bottom 0.5: LED3.A 77.95,13.45 77.1,12.6 R4.1
N$27
  Bottom 0.5: LED2.A 77.95,10.55 76.9,11.6 R1.1
N$28
  Bottom 0.5: R2.1 71.8,4.3 71.5,4 LED1.A
N$29
  Bottom 0.5: SW29.2 SW30.1
N$30
  Bottom 0.5: SW27.1 SW26.2
N$31
  Bottom 0.5: SW23.2 SW24.1
N$32
  Bottom 0.5: SW18.1 SW17.2
N$33
  Bottom 0.5: SW21.1 SW20.2
N$34
  Bottom 0.5: SW26.1 SW25.2
N$35
  Bottom 0.5: SW22.2 SW23.1
N$36
  Bottom 0.5: SW20.1 SW19.2
N$37
  Bottom 0.5: SW17.1 SW16.2
N$38
  Bottom 0.5: SW28.2 SW29.1
N$39
  Bottom 0.5: LED8.A 36,66 34.9,67.1 34.9,68.8 33.2,70.5 R7.1
N$40
  Bottom 0.5: LED7.A 34.95,56.45 34.1,55.6 R8.1
N$41
  Bottom 0.5: LED6.A 34.95,53.55 33.9,54.6 R5.1
N$42
  Bottom 0.5: R6.1 28.8,47.3 28.5,47 LED5.A
N$43
  Bottom 0.5: SW44.2 SW45.1
N$44
  Bottom 0.5: SW42.1 SW41.2
N$45
  Bottom 0.5: SW38.2 SW39.1
N$46
  Bottom 0.5: SW33.1 SW32.2
N$47
  Bottom 0.5: SW36.1 SW35.2
N$48
  Bottom 0.5: SW41.1 SW40.2
N$49
  Bottom 0.5: SW37.2 SW38.1
N$50
  Bottom 0.5: SW35.1 SW34.2
N$51
  Bottom 0.5: SW32.1 SW31.2
N$52
  Bottom 0.5: SW43.2 SW44.1
N$53
  Bottom 0.5: LED12.A 79,66 77.9,67.1 77.9,68.8 76.2,70.5 R11.1
N$54
  Bottom 0.5: LED11.A 77.95,56.45 77.1,55.6 R12.1
N$55
  Bottom 0.5: LED10.A 77.95,53.55 76.9,54.6 R9.1
N$56
  Bottom 0.5: R10.1 71.8,47.3 71.5,47 LED9.A
R0
  Bottom 0.5: 19.6,8.5 19.6,16.5 | 19.6,24.5 19.6,16.5 | SW113.4 14.95,32.5 18.5,32.5 19.6,31.4 19.6,24.5 | 19.6,8.5 19.6,6.3 19.2,5.9 19.2,3.9 18.2,2.9 14.95,2.9 SW101.4 12.55,2.9 12.02,2.9 10,4.92 10,10.43 9.43,11 CN101.5 | 19.6,8.5 14.95,8.5 SW104.4 | 19.6,16.5 14.95,16.5 SW107.4 | 19.6,24.5 14.95,24.5 SW110.4
R1  (via drill 0.3 pad 0.7)
  Top 0.5: SW102.4 22.6,1.7 20.9,3.4 18.1,3.4 v17.8,3.7
  Bottom 0.3: 3.4,12 4.6,12
  Bottom 0.5: CN101.6 3,12 3.4,12 | SW114.4 22.7,33.7 20.4,31.4 20.4,25.7 | 20.4,9.7 20.4,5.95 20,5.55 20,2.5 20.8,1.7 SW102.4 | 20.4,9.7 20.4,17.7 | 20.4,17.7 20.4,25.7 | SW105.4 20.4,9.7 | SW108.4 20.4,17.7 | SW111.4 20.4,25.7 | 4.6,12 4.9,11.7 9.72,11.7 10.7,10.72 10.7,5.21 12.31,3.6 17.7,3.6 v17.8,3.7
R2  (via drill 0.3 pad 0.7)
  Top 0.5: v18.3,4.6 18.7,4.2 21.2,4.2 22.4,3 24.35,3 25.65,1.7 SW103.3 26.8,1.7 27.9,2.8 v27.9,4.9
  Bottom 0.5: CN101.7 4.6,13 5.2,12.4 10.01,12.4 11.4,11.01 11.4,5.5 12.6,4.3 17.2,4.3 17.5,4.6 v18.3,4.6 | 26.85,17.7 28,18.85 28,24.55 26.85,25.7 SW112.3 25.55,25.7 24.35,26.9 22.8,26.9 22.2,27.5 22.2,28.4 21.1,29.5 21.1,31.1 22.5,32.5 24.3,32.5 24.9,33.1 25.5,33.7 SW115.3 | 26.85,17.7 28,16.55 28,13.15 27.4,12.55 27.4,10.35 26.75,9.7 SW106.3 26.8,9.7 28,8.5 28,5.6 27.9,5.5 v27.9,4.9 | 26.85,17.7 SW109.3
R6
  Bottom 0.5: 62.6,8.5 62.6,16.5 | 62.6,24.5 62.6,16.5 | SW13.4 57.95,32.5 61.5,32.5 62.6,31.4 62.6,24.5 | 62.6,8.5 62.6,6.3 62.2,5.9 62.2,3.9 61.2,2.9 57.95,2.9 SW1.4 55.55,2.9 55.02,2.9 53,4.92 53,10.43 52.43,11 CN1.5 | 62.6,8.5 57.95,8.5 SW4.4 | 62.6,16.5 57.95,16.5 SW7.4 | 62.6,24.5 57.95,24.5 SW10.4
R7  (via drill 0.3 pad 0.7)
  Top 0.5: SW2.4 65.6,1.7 63.9,3.4 61.1,3.4 v60.8,3.7
  Bottom 0.3: 46.4,12 47.6,12
  Bottom 0.5: CN1.6 46,12 46.4,12 | SW14.4 65.7,33.7 63.4,31.4 63.4,25.7 | 63.4,9.7 63.4,5.95 63,5.55 63,2.5 63.8,1.7 SW2.4 | 63.4,9.7 63.4,17.7 | 63.4,17.7 63.4,25.7 | SW5.4 63.4,9.7 | SW8.4 63.4,17.7 | SW11.4 63.4,25.7 | 47.6,12 47.9,11.7 52.72,11.7 53.7,10.72 53.7,5.21 55.31,3.6 60.7,3.6 v60.8,3.7
R8  (via drill 0.3 pad 0.7)
  Top 0.5: v61.3,4.6 61.7,4.2 64.2,4.2 65.4,3 67.35,3 68.65,1.7 SW3.3 69.8,1.7 70.9,2.8 v70.9,4.9
  Bottom 0.5: CN1.7 47.6,13 48.2,12.4 53.01,12.4 54.4,11.01 54.4,5.5 55.6,4.3 60.2,4.3 60.5,4.6 v61.3,4.6 | 69.85,17.7 71,18.85 71,24.55 69.85,25.7 SW12.3 68.55,25.7 67.35,26.9 65.8,26.9 65.2,27.5 65.2,28.4 64.1,29.5 64.1,31.1 65.5,32.5 67.3,32.5 67.9,33.1 68.5,33.7 SW15.3 | 69.85,17.7 71,16.55 71,13.15 70.4,12.55 70.4,10.35 69.75,9.7 SW6.3 69.8,9.7 71,8.5 71,5.6 70.9,5.5 v70.9,4.9 | 69.85,17.7 SW9.3
R12
  Bottom 0.5: 19.6,51.5 19.6,59.5 | 19.6,67.5 19.6,59.5 | SW28.4 14.95,75.5 18.5,75.5 19.6,74.4 19.6,67.5 | 19.6,51.5 19.6,49.3 19.2,48.9 19.2,46.9 18.2,45.9 14.95,45.9 SW16.4 12.55,45.9 12.02,45.9 10,47.92 10,53.43 9.43,54 CN2.5 | 19.6,51.5 14.95,51.5 SW19.4 | 19.6,59.5 14.95,59.5 SW22.4 | 19.6,67.5 14.95,67.5 SW25.4
R13  (via drill 0.3 pad 0.7)
  Top 0.5: SW17.4 22.6,44.7 20.9,46.4 18.1,46.4 v17.8,46.7
  Bottom 0.3: 3.4,55 4.6,55
  Bottom 0.5: CN2.6 3,55 3.4,55 | SW29.4 22.7,76.7 20.4,74.4 20.4,68.7 | 20.4,52.7 20.4,48.95 20,48.55 20,45.5 20.8,44.7 SW17.4 | 20.4,52.7 20.4,60.7 | 20.4,60.7 20.4,68.7 | SW20.4 20.4,52.7 | SW23.4 20.4,60.7 | SW26.4 20.4,68.7 | 4.6,55 4.9,54.7 9.72,54.7 10.7,53.72 10.7,48.21 12.31,46.6 17.7,46.6 v17.8,46.7
R14  (via drill 0.3 pad 0.7)
  Top 0.3: 24.55,45.8 22.6,45.8 22.4,46
  Top 0.5: 22.4,46 21.2,47.2 18.7,47.2 v18.3,47.6 | 24.55,45.8 25.65,44.7 SW18.3 26.8,44.7 27.9,45.8 v27.9,47.9
  Bottom 0.5: CN2.7 4.6,56 5.2,55.4 10.01,55.4 11.4,54.01 11.4,48.5 12.6,47.3 17.2,47.3 17.5,47.6 v18.3,47.6 | 26.85,60.7 28,61.85 28,67.55 26.85,68.7 SW27.3 25.55,68.7 24.35,69.9 22.8,69.9 22.2,70.5 22.2,71.4 21.1,72.5 21.1,74.1 22.5,75.5 24.3,75.5 24.9,76.1 25.5,76.7 SW30.3 | 26.85,60.7 28,59.55 28,56.15 27.4,55.55 27.4,53.35 26.75,52.7 SW21.3 26.8,52.7 28,51.5 28,48.6 27.9,48.5 v27.9,47.9 | 26.85,60.7 SW24.3
R18
  Bottom 0.5: 62.6,51.5 62.6,59.5 | 62.6,67.5 62.6,59.5 | SW43.4 57.95,75.5 61.5,75.5 62.6,74.4 62.6,67.5 | 62.6,51.5 62.6,49.3 62.2,48.9 62.2,46.9 61.2,45.9 57.95,45.9 SW31.4 55.55,45.9 55.02,45.9 53,47.92 53,53.43 52.43,54 CN3.5 | 62.6,51.5 57.95,51.5 SW34.4 | 62.6,59.5 57.95,59.5 SW37.4 | 62.6,67.5 57.95,67.5 SW40.4
R19  (via drill 0.3 pad 0.7)
  Top 0.5: SW32.4 65.6,44.7 63.9,46.4 61.1,46.4 v60.8,46.7
  Bottom 0.3: 46.4,55 47.6,55
  Bottom 0.5: CN3.6 46,55 46.4,55 | SW44.4 65.7,76.7 63.4,74.4 63.4,68.7 | 63.4,52.7 63.4,48.95 63,48.55 63,45.5 63.8,44.7 SW32.4 | 63.4,52.7 63.4,60.7 | 63.4,60.7 63.4,68.7 | SW35.4 63.4,52.7 | SW38.4 63.4,60.7 | SW41.4 63.4,68.7 | 47.6,55 47.9,54.7 52.72,54.7 53.7,53.72 53.7,48.21 55.31,46.6 60.7,46.6 v60.8,46.7
R20  (via drill 0.3 pad 0.7)
  Top 0.3: 67.55,45.8 65.6,45.8 65.4,46
  Top 0.5: 65.4,46 64.2,47.2 61.7,47.2 v61.3,47.6 | 67.55,45.8 68.65,44.7 SW33.3 69.8,44.7 70.9,45.8 v70.9,47.9
  Bottom 0.5: CN3.7 47.6,56 48.2,55.4 53.01,55.4 54.4,54.01 54.4,48.5 55.6,47.3 60.2,47.3 60.5,47.6 v61.3,47.6 | 69.85,60.7 71,61.85 71,67.55 69.85,68.7 SW42.3 68.55,68.7 67.35,69.9 65.8,69.9 65.2,70.5 65.2,71.4 64.1,72.5 64.1,74.1 65.5,75.5 67.3,75.5 67.9,76.1 68.5,76.7 SW45.3 | 69.85,60.7 71,59.55 71,56.15 70.4,55.55 70.4,53.35 69.75,52.7 SW36.3 69.8,52.7 71,51.5 71,48.6 70.9,48.5 v70.9,47.9 | 69.85,60.7 SW39.3

## Text on the board
tPlace: 1 | 2 | 3 | & | D | (Fn+) | L | 5 | CLICK/↵ | CLICK_R/SP | A | 5 | O | 5 | 5 | P | 5 | 5 | R | 5 | SCROLL | Y | 5 | 4 | 5 | 6 | T | D | E | D | N | M | K | M | O | I | I | C | @ | N | @ | 7 | 8 | 9 | PWR | O | E | E | I | T | S | 1 | T | 1 | O | U | MODE | C | A | B | MODE | M | O | 2 | N | 2 | E | M | U | P.OFF | P.OFF | R | F | C | Slow | Fn | Fn | 1 | 2 | 3 | & | D | (Fn+) | L | 5 | CLICK/↵ | CLICK_R/SP | A | 5 | O | 5 | 5 | P | 5 | 5 | R | 5 | SCROLL | Y | 5 | 4 | 5 | 6 | T | D | E | D | N | M | K | M | O | I | I | C | @ | N | @ | 7 | 8 | 9 | PWR | O | E | E | I | T | S | 1 | T | 1 | O | U | MODE | C | A | B | MODE | M | O | 2 | N | 2 | E | M | U | P.OFF | P.OFF | R | F | C | Slow | Fn | Fn
bPlace: Seeed Fusion PCB / Production Code:
_bNames: SW113 | SW113 | SW114 | SW115 | SW114 | SW115 | R104 | R104 | SW110 | SW111 | SW112 | SW110 | SW111 | SW112 | SW107 | SW108 | SW109 | LED104 | SW107 | SW108 | SW109 | LED104 | SW104 | SW105 | SW106 | SW104 | SW105 | SW106 | R103 | R103 | CN101 | LED103 | CN101 | LED103 | R102 | R102 | SW101 | SW102 | SW103 | SW101 | SW102 | SW103 | LED102 | LED102 | R101 | R101 | LED101 | LED101 | SW113 | SW113 | SW114 | SW115 | SW114 | SW115 | R104 | R104 | SW110 | SW111 | SW112 | SW110 | SW111 | SW112 | SW107 | SW108 | SW109 | LED104 | SW107 | SW108 | SW109 | LED104 | SW104 | SW105 | SW106 | SW104 | SW105 | SW106 | R103 | R103 | CN101 | LED103 | CN101 | LED103 | R102 | R102 | SW101 | SW102 | SW103 | SW101 | SW102 | SW103 | LED102 | LED102 | R101 | R101 | LED101 | LED101